# Altium PCB FPGA_board.PcbDoc (part 7 of 7)
Units mm, origin at the board's own origin, x right, y up, seen from the top; angles counter-clockwise.
Board outline 120 x 95 mm, 2 copper layers (Top Layer, Bottom Layer); 242 components, 219 nets, 1224 pads, 430 vias.
Unrouted connection lines stored in the file: 9.
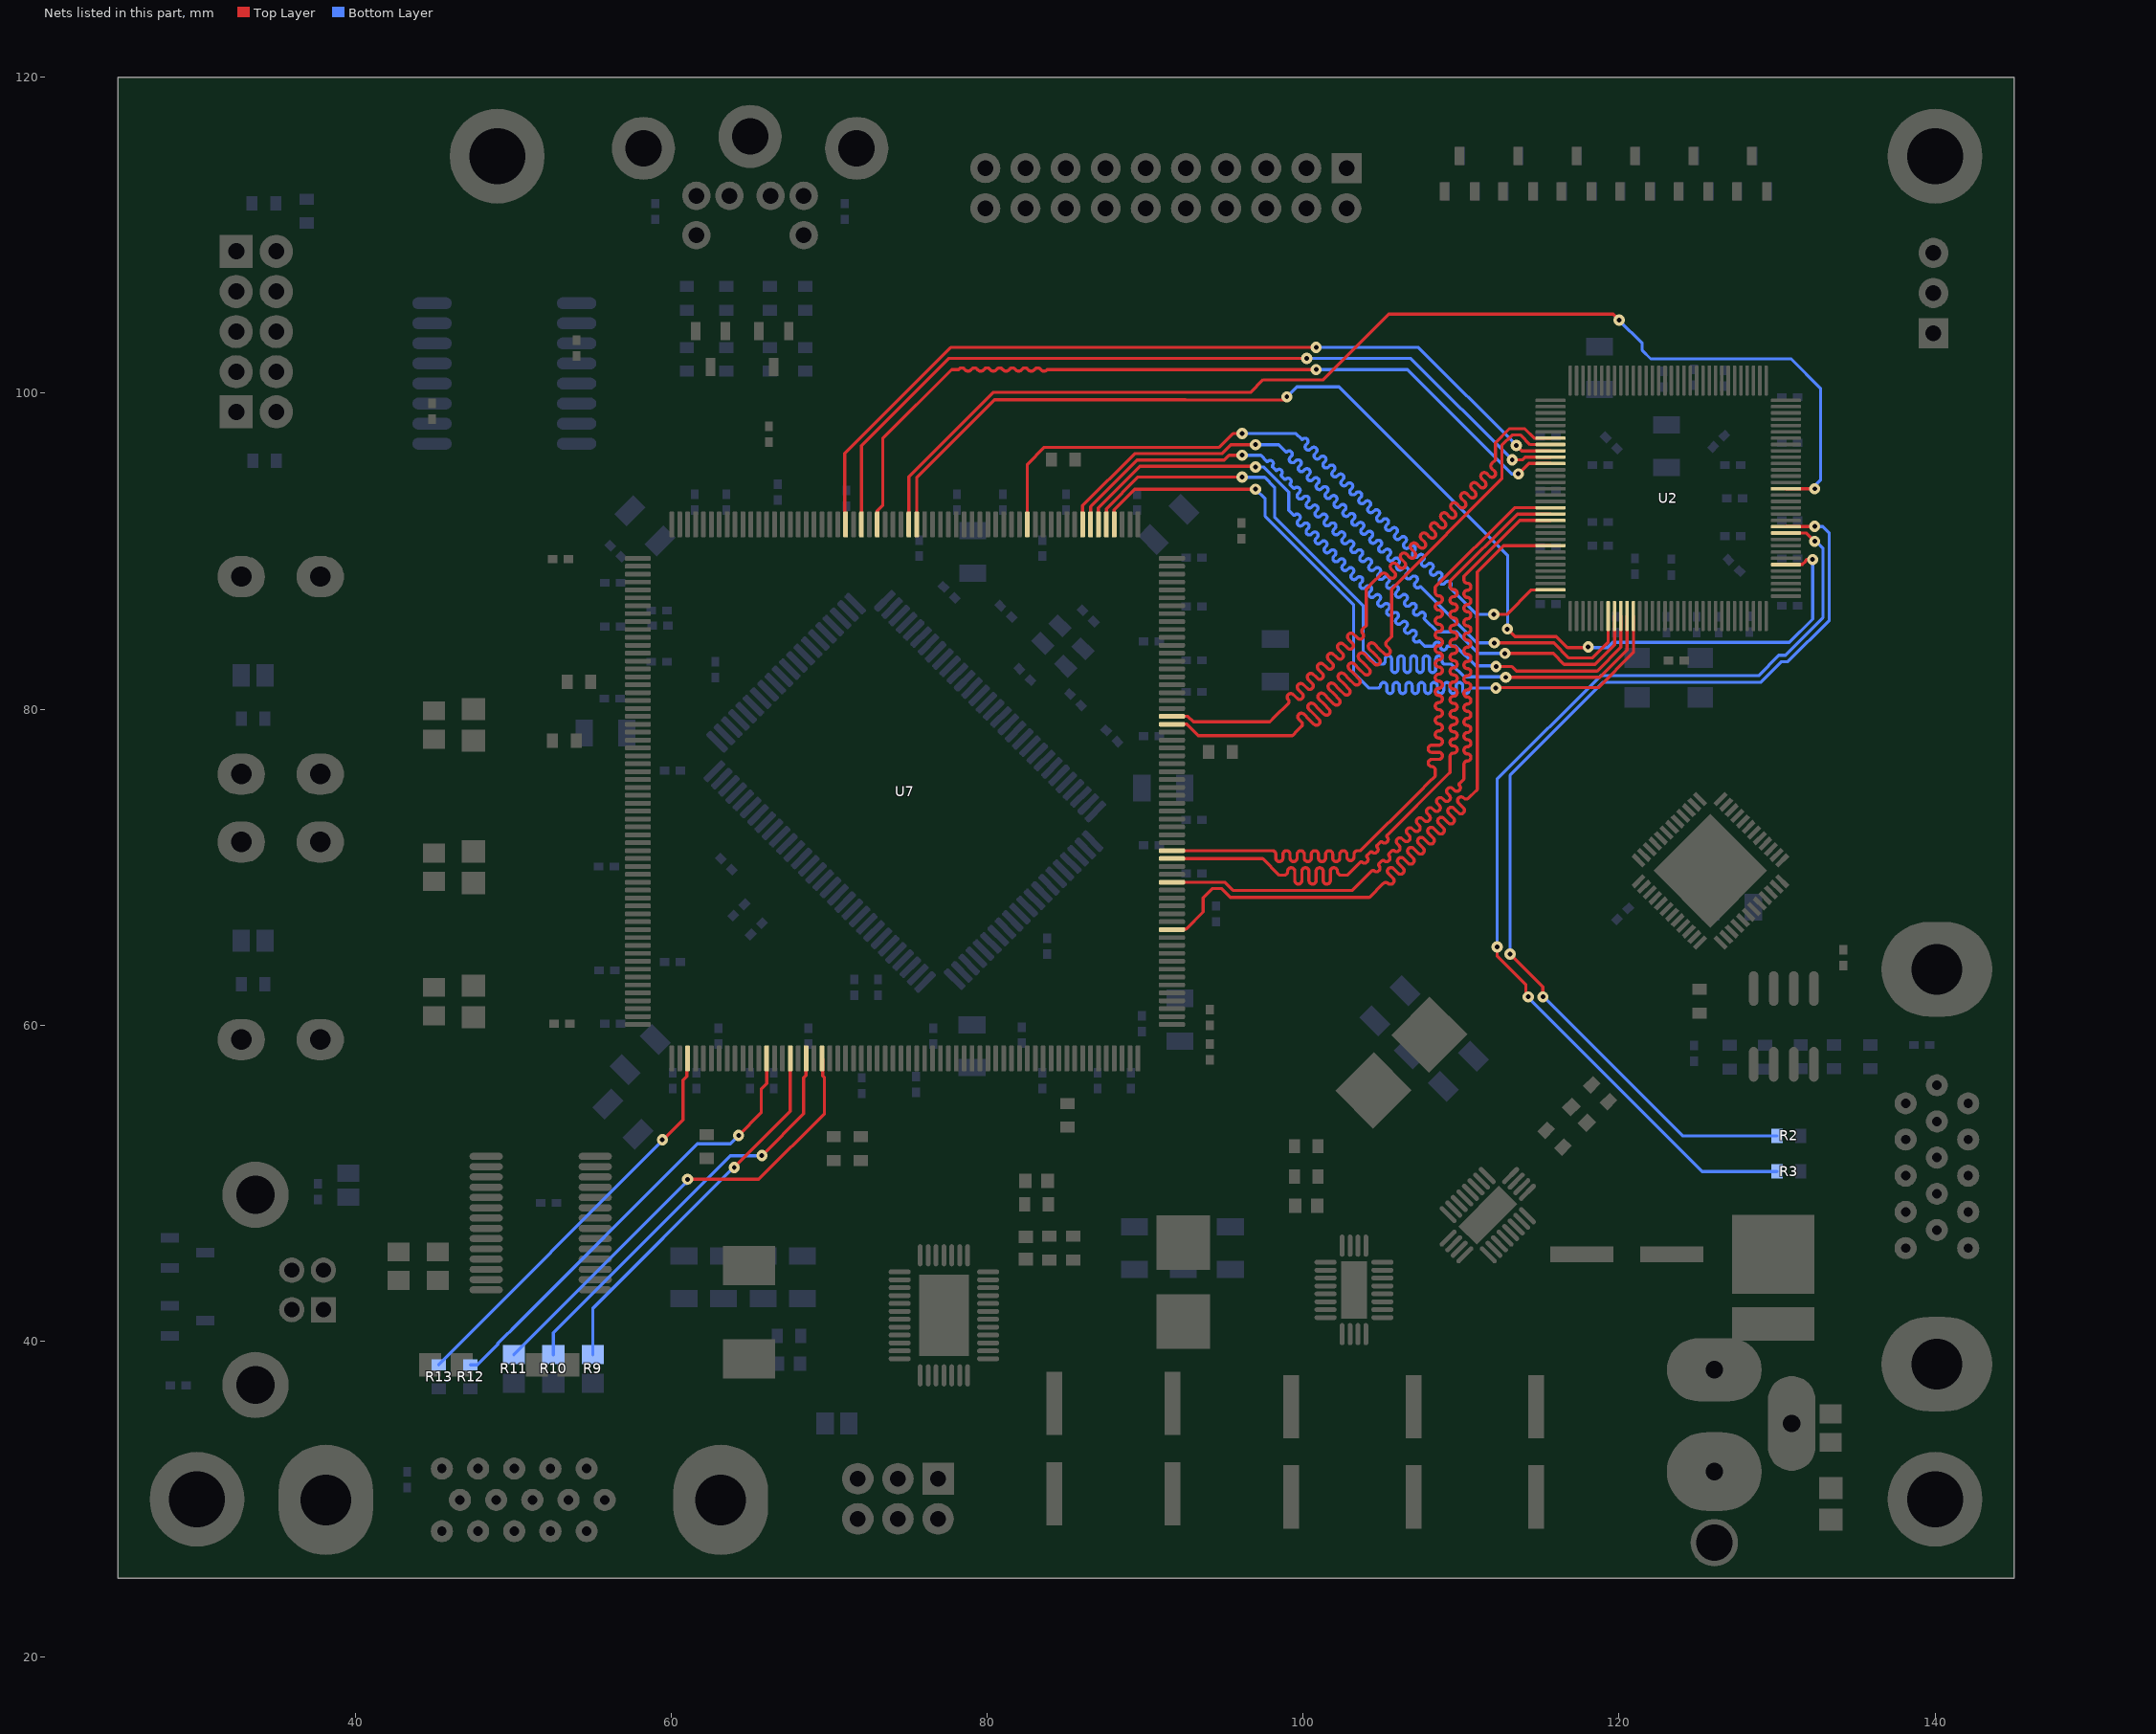
[diagram p7: the nets of this part, all layers, seen from the top]

## Via types
v1: diameter 0.71, hole 0.3, Top Layer to Bottom Layer, 393 vias
v2: diameter 1.4, hole 0.6, Top Layer to Bottom Layer, 32 vias
v3: diameter 2, hole 0.9, Top Layer to Bottom Layer, 4 vias
v4: diameter 1.2, hole 0.5, Top Layer to Bottom Layer, 1 vias

## Nets (pads, with @x,y where several pads share a name; then routed paths per layer and width w, separated by ;. In a path a pad name is that pad's centre, name@x,y a point inside that pad or via, vN(x,y) a via of type N, cw(c..) or ccw(c..) an arc to the next point about the centre after c; other vN are vias at no path point) (continued)
VGA1_G3: U2.107 U7.214 | length 62.5
  Top Layer w0.2: U7.214@73.05,91.7 73.05,92.555 73.397,92.902 73.397,97.135 77.762,101.5 78.2,101.5 cw(c78.4,101.35) 78.6,101.5 ccw(c78.8,101.65) 79,101.5 cw(c79.2,101.35) 79.4,101.5 ccw(c79.6,101.65) 79.8,101.5 cw(c80,101.35) 80.2,101.5 ccw(c80.4,101.65) 80.6,101.5 cw(c80.8,101.35) 81,101.5 ccw(c81.2,101.65) 81.4,101.5 cw(c81.6,101.35) 81.8,101.5 ccw(c82,101.65) 82.2,101.5 cw(c82.4,101.35) 82.6,101.5 ccw(c82.8,101.65) 83,101.5 cw(c83.2,101.35) 83.4,101.5 ccw(c83.6,101.65) 83.8,101.5 84.2,101.5 84.6,101.5 85.8,101.5 ; 85,101.5 85.8,101.5 ; 85.4,101.5 85.8,101.5 ; 88.6,101.5 89.4,101.5 ; 89,101.5 89.4,101.5 ; 91.8,101.5 91.4,101.5 ; 94.2,101.5 95,101.5 ; 94.6,101.5 95,101.5 ; v1(100.825,101.5) 98.6,101.5 98.2,101.5 97.8,101.5 97.4,101.5 97,101.5 96.6,101.5 96.2,101.5 95.8,101.5 95.4,101.5 91.4,101.5 ; v1(113.63,94.895) 114.289,95.553 U2.107@115.66,95.553 ; 85.8,101.5 86.2,101.5 86.6,101.5 87,101.5 87.4,101.5 87.8,101.5 88.2,101.5 89.4,101.5 ; 89.4,101.5 89.8,101.5 90.2,101.5 90.6,101.5 91,101.5 91.4,101.5 ; 91.4,101.5 92.2,101.5 92.6,101.5 93,101.5 93.4,101.5 93.8,101.5 95,101.5
  Bottom Layer w0.2: v1@100.7,101.5 101.1,101.5 101.5,101.5 101.9,101.5 102.3,101.5 102.7,101.5 103.1,101.5 103.5,101.5 103.9,101.5 104.3,101.5 105.5,101.5 ; 104.7,101.5 105.5,101.5 ; 105.1,101.5 105.5,101.5 ; v1(113.63,94.895) 113.205,94.895 106.7,101.4 106.6,101.5 106.3,101.5 105.9,101.5 105.5,101.5
VGA1_G4: U2.106 U7.216 | length 53.6
  Top Layer w0.2: U7.216@72.05,91.7 72.05,96.684 77.566,102.2 100.225,102.2 v1(100.23,102.205) ; v1(113.238,95.79) 113.9,95.79 114.064,95.953 U2.106@115.66,95.953
  Bottom Layer w0.2: v1@100.23,102.2 106.827,102.2 v1(113.238,95.79)
VGA1_G5: U2.105 U7.218 | length 54.3
  Top Layer w0.2: U7.218@71,92 71,96.2 77.7,102.9 v1(100.825,102.9) ; v1(113.5,96.7) 113.846,96.353 U2.105@115.66,96.353
  Bottom Layer w0.2: v1(100.825,102.9) 107.3,102.9 v1(113.5,96.7)
VGA1_G6: U2.104 U7.159 | length 53.6
  Top Layer w0.2: U7.159@91.7,79.05 92.653,79.05 93.376,78.326 99.326,78.326 99.65,78.65 99.891,78.891 ccw(c99.732,79.05) 99.891,79.209 99.734,79.366 cw(c99.893,79.525) 99.734,79.684 cw(c99.893,79.525) 100.052,79.684 100.368,79.368 100.684,79.052 ccw(c100.843,79.211) 101.002,79.052 ccw(c100.843,79.211) 101.002,79.37 100.686,79.686 100.37,80.002 cw(c100.529,80.161) 100.37,80.32 cw(c100.529,80.161) 100.689,80.32 101.004,80.004 101.32,79.689 ccw(c101.479,79.848) 101.638,79.689 ccw(c101.479,79.848) 101.638,80.007 101.323,80.323 101.007,80.638 cw(c101.166,80.797) 101.007,80.957 cw(c101.166,80.797) 101.325,80.957 101.641,80.641 101.957,80.325 ccw(c102.116,80.484) 102.275,80.325 ccw(c102.116,80.484) 102.275,80.643 101.959,80.959 101.643,81.275 cw(c101.802,81.434) 101.643,81.593 cw(c101.802,81.434) 101.961,81.593 102.277,81.277 102.593,80.961 ccw(c102.752,81.12) 102.911,80.961 ccw(c102.752,81.12) 102.911,81.279 102.595,81.595 102.28,81.911 cw(c102.439,82.07) 102.279,82.229 cw(c102.439,82.07) 102.598,82.229 102.914,81.914 103.229,81.598 ccw(c103.388,81.757) 103.548,81.598 ccw(c103.388,81.757) 103.548,81.916 103.232,82.232 102.916,82.548 cw(c103.075,82.707) 102.916,82.866 cw(c103.075,82.707) 103.234,82.866 103.55,82.55 103.866,82.234 ccw(c104.025,82.393) 104.184,82.234 ccw(c104.025,82.393) 104.184,82.552 103.868,82.868 103.552,83.184 cw(c103.711,83.343) 103.552,83.502 cw(c103.711,83.343) 103.87,83.502 104.186,83.186 104.502,82.87 ccw(c104.661,83.03) 104.82,82.87 ccw(c104.661,83.03) 104.82,83.189 104.504,83.505 104.189,83.82 cw(c104.348,83.979) 104.189,84.139 cw(c104.348,83.979) 104.507,84.139 104.823,83.823 105.139,83.507 ccw(c105.298,83.666) 105.457,83.507 ccw(c105.298,83.666) 105.457,83.825 105.3,83.982 cw(c105.459,84.141) 105.3,84.3 105.6,84.6 105.6,87.6 112.583,94.583 112.583,96.709 113.229,97.355 113.771,97.355 114.372,96.753 U2.104@115.66,96.753
VGA1_G7: U2.103 U7.160 | length 54.1
  Top Layer w0.2: U7.160@91.7,79.55 92.719,79.55 93.069,79.2 97.9,79.2 98.2,79.5 99.062,80.362 ccw(c98.939,80.486) 99.062,80.61 cw(c99.221,80.769) 99.062,80.928 cw(c99.221,80.769) 99.381,80.928 99.504,80.804 99.628,80.681 ccw(c99.787,80.84) 99.946,80.681 ccw(c99.787,80.84) 99.946,80.999 99.823,81.123 99.699,81.246 cw(c99.858,81.405) 99.699,81.564 cw(c99.858,81.405) 100.017,81.564 100.141,81.441 100.264,81.317 ccw(c100.424,81.476) 100.583,81.317 ccw(c100.424,81.476) 100.583,81.635 100.459,81.759 100.335,81.883 cw(c100.494,82.042) 100.335,82.201 cw(c100.494,82.042) 100.653,82.201 100.777,82.077 100.901,81.953 ccw(c101.06,82.112) 101.219,81.953 ccw(c101.06,82.112) 101.219,82.272 101.095,82.395 100.972,82.519 cw(c101.131,82.678) 100.972,82.837 cw(c101.131,82.678) 101.29,82.837 101.414,82.714 101.537,82.59 ccw(c101.696,82.749) 101.855,82.59 ccw(c101.696,82.749) 101.855,82.908 101.732,83.032 101.608,83.155 cw(c101.767,83.315) 101.608,83.474 cw(c101.767,83.315) 101.926,83.474 102.05,83.35 102.174,83.226 ccw(c102.333,83.385) 102.492,83.226 ccw(c102.333,83.385) 102.492,83.544 102.368,83.668 102.244,83.792 cw(c102.403,83.951) 102.244,84.11 cw(c102.403,83.951) 102.563,84.11 102.686,83.986 102.81,83.863 ccw(c102.969,84.022) 103.128,83.863 ccw(c102.969,84.022) 103.128,84.181 103.005,84.304 102.881,84.428 cw(c103.04,84.587) 102.881,84.746 cw(c103.04,84.587) 103.199,84.746 103.323,84.623 103.446,84.499 ccw(c103.606,84.658) 103.765,84.499 ccw(c103.606,84.658) 103.765,84.817 cw(c103.888,84.941) 103.765,85.065 103.8,85.1 104,85.3 104,87.6 104.5,88.1 104.791,88.391 104.95,88.55 cw(c105.109,88.391) 105.268,88.55 105.467,88.351 ccw(c105.626,88.51) 105.785,88.351 ccw(c105.626,88.51) 105.785,88.669 105.586,88.868 cw(c105.745,89.027) 105.586,89.186 cw(c105.745,89.027) 105.904,89.186 106.103,88.987 ccw(c106.262,89.146) 106.421,88.987 ccw(c106.262,89.146) 106.421,89.305 106.222,89.504 cw(c106.382,89.663) 106.222,89.822 cw(c106.382,89.663) 106.541,89.822 106.74,89.623 ccw(c106.899,89.783) 107.058,89.623 ccw(c106.899,89.783) 107.058,89.942 106.859,90.141 cw(c107.018,90.3) 106.859,90.459 cw(c107.018,90.3) 107.177,90.459 107.376,90.26 ccw(c107.535,90.419) 107.694,90.26 ccw(c107.535,90.419) 107.694,90.578 107.495,90.777 cw(c107.654,90.936) 107.495,91.095 cw(c107.654,90.936) 107.813,91.095 108.012,90.896 ccw(c108.172,91.055) 108.331,90.896 ccw(c108.172,91.055) 108.331,91.214 108.132,91.413 cw(c108.291,91.573) 108.132,91.732 cw(c108.291,91.573) 108.45,91.732 108.649,91.533 ccw(c108.808,91.692) 108.967,91.533 ccw(c108.808,91.692) 108.967,91.851 108.768,92.05 cw(c108.927,92.209) 108.768,92.368 cw(c108.927,92.209) 109.086,92.368 109.285,92.169 ccw(c109.444,92.328) 109.603,92.169 ccw(c109.444,92.328) 109.603,92.487 109.404,92.686 cw(c109.564,92.845) 109.404,93.004 cw(c109.564,92.845) 109.723,93.004 109.922,92.805 ccw(c110.081,92.965) 110.24,92.805 ccw(c110.081,92.965) 110.24,93.124 110.041,93.323 cw(c110.2,93.482) 110.041,93.641 cw(c110.2,93.482) 110.359,93.641 110.558,93.442 ccw(c110.717,93.601) 110.876,93.442 ccw(c110.717,93.601) 110.876,93.76 110.677,93.959 cw(c110.836,94.118) 110.677,94.277 cw(c110.836,94.118) 110.995,94.277 111.194,94.078 ccw(c111.353,94.237) 111.513,94.078 ccw(c111.354,94.237) 111.513,94.396 111.314,94.595 cw(c111.473,94.755) 111.314,94.914 cw(c111.473,94.755) 111.632,94.914 111.799,94.747 ccw(c111.958,94.906) 112.117,94.747 ccw(c111.958,94.906) 112.117,95.065 111.95,95.232 cw(c112.109,95.391) 111.95,95.55 112.183,95.783 112.183,96.874 113.063,97.755 114.035,97.755 114.636,97.153 115.436,97.153 U2.103@115.66,97.153
VGA1_HSYNC: R2.2 U2.44 | length 66
  Top Layer w0.2: v1(113.106,64.503) 115.182,62.426 v1(115.182,61.8) ; U2.44@130.56,91.553 132.455,91.553 v1@132.456,91.554
  Bottom Layer w0.2: v1(113.106,64.503) 113.106,75.836 118.97,81.7 128.966,81.7 130.276,83.01 130.69,83.01 133.305,85.626 133.305,91.145 132.896,91.554 v1@132.456,91.554 ; v1@115.204,61.822 124.025,53 R2.2@130,53
  other v1: 132.381,91.579
VGA1_PIXEL_CLK: U2.38 U7.209 | length 79
  Top Layer w0.2: U7.209@75.55,91.7 75.55,94.65 80.48,99.58 92.546,99.58 92.551,99.575 98.775,99.575 v1(98.975,99.775) ; v1(112.931,85.079) 113.415,84.595 116.036,84.595 116.732,83.9 v1@118,83.9 ; v1(132.25,89.475) 131.875,89.475 131.79,89.39 131.79,89.36 131.594,89.163 ; 131.594,89.163 131.584,89.153 U2.38@130.56,89.153 130.57,89.163 131.594,89.163
  Bottom Layer w0.2: v1(98.975,99.775) 99.6,100.4 99.675,100.4 99.68,100.405 102.27,100.405 112.955,89.72 112.955,85.104 v1(112.931,85.079) ; v1@118,83.9 119.275,83.9 119.6,84.225 130.773,84.225 132.25,85.702 v1(132.25,89.475)
  other v1: 118.05,83.95
VGA1_R0: U2.7 U7.188 | length 53.7
  Top Layer w0.2: U7.188@86.05,91.7 86.05,92.888 89.337,96.175 94.856,96.175 95.423,96.742 v1(96.988,96.742) ; v1(112.1,84.2) 112.105,84.195 115.871,84.195 116.821,83.245 118.305,83.245 119.31,84.249 U2.7@119.31,85.903
  Bottom Layer w0.2: v1@96.803,96.71 v1@96.988,96.71 ; v1(96.988,96.742) 98.458,96.742 98.906,96.294 ccw(c98.941,96.329) 98.977,96.294 cw(c99.118,96.153) 99.26,96.294 cw(c99.118,96.153) 99.26,96.011 99.224,95.976 99.189,95.94 ccw(c99.33,95.799) 99.189,95.658 ccw(c99.33,95.799) 99.472,95.658 99.542,95.728 cw(c99.684,95.587) 99.825,95.728 cw(c99.684,95.587) 99.825,95.445 99.79,95.41 99.755,95.375 ccw(c99.896,95.233) 99.755,95.092 ccw(c99.896,95.233) 100.037,95.092 100.073,95.127 100.108,95.163 cw(c100.25,95.021) 100.391,95.163 cw(c100.25,95.021) 100.391,94.88 100.356,94.844 100.32,94.809 ccw(c100.462,94.668) 100.32,94.526 ccw(c100.462,94.668) 100.603,94.526 100.638,94.562 100.674,94.597 cw(c100.815,94.455) 100.957,94.597 cw(c100.815,94.455) 100.957,94.314 100.921,94.279 100.886,94.243 ccw(c101.027,94.102) 100.886,93.96 ccw(c101.027,94.102) 101.169,93.96 101.24,94.031 cw(c101.381,93.89) 101.522,94.031 cw(c101.381,93.89) 101.522,93.748 101.487,93.713 101.452,93.678 ccw(c101.593,93.536) 101.452,93.395 ccw(c101.593,93.536) 101.734,93.395 101.77,93.43 101.805,93.465 cw(c101.947,93.324) 102.088,93.466 cw(c101.947,93.324) 102.088,93.183 102.053,93.147 102.017,93.112 ccw(c102.159,92.971) 102.017,92.829 ccw(c102.159,92.971) 102.3,92.829 102.336,92.864 102.371,92.9 cw(c102.512,92.758) 102.654,92.9 cw(c102.512,92.758) 102.654,92.617 102.618,92.582 102.583,92.546 ccw(c102.724,92.405) 102.583,92.263 ccw(c102.724,92.405) 102.866,92.263 102.937,92.334 cw(c103.078,92.193) 103.219,92.334 cw(c103.078,92.193) 103.219,92.051 103.184,92.016 103.149,91.981 ccw(c103.29,91.839) 103.149,91.698 ccw(c103.29,91.839) 103.432,91.698 103.467,91.733 103.502,91.768 cw(c103.644,91.627) 103.785,91.768 cw(c103.644,91.627) 103.785,91.486 103.75,91.45 103.714,91.415 ccw(c103.856,91.273) 103.714,91.132 ccw(c103.856,91.273) 103.997,91.132 104.033,91.167 104.068,91.203 cw(c104.209,91.061) 104.351,91.203 cw(c104.209,91.061) 104.351,90.92 104.28,90.849 ccw(c104.421,90.708) 104.28,90.566 ccw(c104.421,90.708) 104.563,90.566 104.598,90.602 104.634,90.637 cw(c104.775,90.496) 104.916,90.637 cw(c104.775,90.496) 104.916,90.354 104.881,90.319 104.846,90.284 ccw(c104.987,90.142) 104.846,90.001 ccw(c104.987,90.142) 105.129,90.001 105.164,90.036 105.199,90.071 cw(c105.341,89.93) 105.482,90.071 cw(c105.341,89.93) 105.482,89.789 105.447,89.753 105.411,89.718 ccw(c105.553,89.576) 105.411,89.435 ccw(c105.553,89.576) 105.694,89.435 105.73,89.47 105.765,89.506 cw(c105.906,89.364) 106.048,89.506 cw(c105.906,89.364) 106.048,89.223 105.977,89.152 ccw(c106.119,89.011) 105.977,88.869 ccw(c106.119,89.011) 106.26,88.869 106.295,88.905 106.331,88.94 cw(c106.472,88.799) 106.614,88.94 cw(c106.472,88.799) 106.614,88.657 106.578,88.622 106.543,88.586 ccw(c106.684,88.445) 106.543,88.304 ccw(c106.684,88.445) 106.826,88.304 106.861,88.339 106.896,88.374 cw(c107.038,88.233) 107.179,88.374 cw(c107.038,88.233) 107.179,88.092 107.144,88.056 107.108,88.021 ccw(c107.25,87.879) 107.108,87.738 ccw(c107.25,87.879) 107.391,87.738 cw(c107.427,87.703) 107.462,87.738 111,84.2 v1(112.1,84.2)
VGA1_R1: U2.8 U7.187 | length 53.8
  Top Layer w0.2: U7.187@86.55,91.7 86.55,92.822 89.503,95.775 95.022,95.775 95.322,96.075 v1(96.15,96.075) ; v1(112.778,83.529) 115.837,83.529 116.521,82.845 118.471,82.845 119.71,84.084 U2.8@119.71,85.903
  Bottom Layer w0.2: v1@96.15,96.025 v1@96.175,96.05 ; v1(96.15,96.075) 97.325,96.075 97.706,95.694 ccw(c97.741,95.729) 97.777,95.694 cw(c97.918,95.553) 98.06,95.694 cw(c97.918,95.553) 98.06,95.411 ccw(c98.095,95.376) 98.06,95.34 98.272,95.128 ccw(c98.307,95.164) 98.342,95.128 cw(c98.484,94.987) 98.625,95.128 cw(c98.484,94.987) 98.625,94.845 ccw(c98.661,94.81) 98.625,94.775 98.837,94.563 ccw(c98.873,94.598) 98.908,94.563 cw(c99.05,94.421) 99.191,94.563 cw(c99.05,94.421) 99.191,94.28 ccw(c99.226,94.244) 99.191,94.209 99.403,93.997 ccw(c99.438,94.032) 99.474,93.997 cw(c99.615,93.855) 99.757,93.997 cw(c99.615,93.855) 99.757,93.714 99.721,93.679 99.686,93.643 ccw(c99.827,93.502) 99.686,93.36 ccw(c99.827,93.502) 99.969,93.36 100.04,93.431 cw(c100.181,93.29) 100.322,93.431 cw(c100.181,93.29) 100.322,93.148 100.287,93.113 100.252,93.078 ccw(c100.393,92.936) 100.252,92.795 ccw(c100.393,92.936) 100.534,92.795 100.57,92.83 100.605,92.865 cw(c100.747,92.724) 100.888,92.866 cw(c100.747,92.724) 100.888,92.583 100.853,92.547 100.817,92.512 ccw(c100.959,92.371) 100.817,92.229 ccw(c100.959,92.371) 101.1,92.229 101.136,92.264 101.171,92.3 cw(c101.312,92.158) 101.454,92.3 cw(c101.312,92.158) 101.454,92.017 101.418,91.982 101.383,91.946 ccw(c101.524,91.805) 101.383,91.663 ccw(c101.524,91.805) 101.666,91.663 101.737,91.734 cw(c101.878,91.593) 102.019,91.734 cw(c101.878,91.593) 102.019,91.451 101.984,91.416 101.949,91.381 ccw(c102.09,91.239) 101.949,91.098 ccw(c102.09,91.239) 102.232,91.098 102.267,91.133 102.302,91.168 cw(c102.444,91.027) 102.585,91.168 cw(c102.444,91.027) 102.585,90.886 102.55,90.85 102.514,90.815 ccw(c102.656,90.673) 102.514,90.532 ccw(c102.656,90.673) 102.797,90.532 102.833,90.567 102.868,90.603 cw(c103.009,90.461) 103.151,90.603 cw(c103.009,90.461) 103.151,90.32 103.08,90.249 ccw(c103.221,90.108) 103.08,89.966 ccw(c103.221,90.108) 103.363,89.966 103.398,90.002 103.434,90.037 cw(c103.575,89.896) 103.716,90.037 cw(c103.575,89.896) 103.716,89.754 103.681,89.719 103.646,89.684 ccw(c103.787,89.542) 103.646,89.401 ccw(c103.787,89.542) 103.929,89.401 103.964,89.436 103.999,89.471 cw(c104.141,89.33) 104.282,89.471 cw(c104.141,89.33) 104.282,89.189 104.247,89.153 104.211,89.118 ccw(c104.353,88.976) 104.211,88.835 ccw(c104.353,88.976) 104.494,88.835 104.53,88.87 104.565,88.906 cw(c104.706,88.764) 104.848,88.906 cw(c104.706,88.764) 104.848,88.623 104.777,88.552 ccw(c104.919,88.411) 104.777,88.269 ccw(c104.919,88.411) 105.06,88.269 105.095,88.305 105.131,88.34 cw(c105.272,88.199) 105.414,88.34 cw(c105.272,88.199) 105.414,88.057 105.378,88.022 105.343,87.986 ccw(c105.484,87.845) 105.343,87.704 ccw(c105.484,87.845) 105.626,87.704 105.661,87.739 105.696,87.774 cw(c105.838,87.633) 105.979,87.774 cw(c105.838,87.633) 105.979,87.492 105.944,87.456 105.909,87.421 ccw(c106.05,87.279) 105.908,87.138 ccw(c106.05,87.279) 106.191,87.138 106.227,87.173 106.262,87.209 cw(c106.403,87.067) 106.545,87.209 cw(c106.403,87.067) 106.545,86.926 106.474,86.855 ccw(c106.616,86.714) 106.474,86.572 ccw(c106.616,86.714) 106.757,86.572 106.792,86.608 106.828,86.643 cw(c106.969,86.502) 107.111,86.643 cw(c106.969,86.502) 107.111,86.36 107.075,86.325 107.04,86.289 ccw(c107.181,86.148) 107.04,86.007 ccw(c107.181,86.148) 107.323,86.007 107.358,86.042 107.393,86.077 cw(c107.535,85.936) 107.676,86.077 cw(c107.535,85.936) 107.676,85.794 ccw(c107.712,85.759) 107.676,85.724 108.5,84.9 109.734,84.9 111.089,83.545 112.762,83.545 v1(112.778,83.529)
VGA1_R2: U2.9 U7.186 | length 53.5
  Top Layer w0.2: U7.186@87.05,91.7 87.05,92.756 89.669,95.375 94.623,95.375 94.628,95.37 v1@96.92,95.37 ; v1(112.213,82.7) 113.224,82.7 113.501,82.422 118.614,82.422 120.11,83.918 U2.9@120.11,85.903
  Bottom Layer w0.2: v1(96.988,95.334) 97.5,95.334 99.1,93.734 99.1,92.6 99.406,92.294 ccw(c99.441,92.329) 99.477,92.294 cw(c99.618,92.153) 99.76,92.294 cw(c99.618,92.153) 99.76,92.011 99.724,91.976 99.689,91.94 ccw(c99.83,91.799) 99.689,91.658 ccw(c99.83,91.799) 99.972,91.658 100.042,91.728 cw(c100.184,91.587) 100.325,91.728 cw(c100.184,91.587) 100.325,91.445 100.29,91.41 100.255,91.375 ccw(c100.396,91.233) 100.255,91.092 ccw(c100.396,91.233) 100.537,91.092 100.573,91.127 100.608,91.163 cw(c100.75,91.021) 100.891,91.163 cw(c100.75,91.021) 100.891,90.88 100.856,90.844 100.82,90.809 ccw(c100.962,90.668) 100.82,90.526 ccw(c100.962,90.668) 101.103,90.526 101.138,90.562 101.174,90.597 cw(c101.315,90.455) 101.457,90.597 cw(c101.315,90.455) 101.457,90.314 101.421,90.279 101.386,90.243 ccw(c101.527,90.102) 101.386,89.96 ccw(c101.527,90.102) 101.669,89.96 101.739,90.031 cw(c101.881,89.89) 102.022,90.031 cw(c101.881,89.89) 102.022,89.748 101.987,89.713 101.952,89.678 ccw(c102.093,89.536) 101.952,89.395 ccw(c102.093,89.536) 102.234,89.395 102.27,89.43 102.305,89.466 cw(c102.447,89.324) 102.588,89.466 cw(c102.447,89.324) 102.588,89.183 102.553,89.147 102.517,89.112 ccw(c102.659,88.971) 102.517,88.829 ccw(c102.659,88.971) 102.8,88.829 102.836,88.864 102.871,88.9 cw(c103.012,88.758) 103.154,88.9 cw(c103.012,88.758) 103.154,88.617 103.118,88.582 103.083,88.546 ccw(c103.224,88.405) 103.083,88.263 ccw(c103.224,88.405) 103.366,88.263 103.437,88.334 cw(c103.578,88.193) 103.719,88.334 cw(c103.578,88.193) 103.719,88.051 103.684,88.016 103.649,87.981 ccw(c103.79,87.839) 103.649,87.698 ccw(c103.79,87.839) 103.932,87.698 103.967,87.733 104.002,87.768 cw(c104.144,87.627) 104.285,87.768 cw(c104.144,87.627) 104.285,87.486 104.25,87.45 104.214,87.415 ccw(c104.356,87.273) 104.214,87.132 ccw(c104.356,87.273) 104.497,87.132 104.533,87.167 104.568,87.203 cw(c104.709,87.061) 104.851,87.203 cw(c104.709,87.061) 104.851,86.92 104.78,86.849 ccw(c104.921,86.708) 104.78,86.566 ccw(c104.921,86.708) 105.063,86.566 105.098,86.602 105.134,86.637 cw(c105.275,86.496) 105.416,86.637 cw(c105.275,86.496) 105.416,86.354 105.381,86.319 105.346,86.284 ccw(c105.487,86.142) 105.346,86.001 ccw(c105.487,86.142) 105.629,86.001 105.664,86.036 105.699,86.071 cw(c105.841,85.93) 105.982,86.071 cw(c105.841,85.93) 105.982,85.789 105.947,85.753 105.911,85.718 ccw(c106.053,85.576) 105.911,85.435 ccw(c106.053,85.576) 106.194,85.435 106.23,85.47 106.265,85.506 cw(c106.406,85.364) 106.548,85.506 cw(c106.406,85.364) 106.548,85.223 106.477,85.152 ccw(c106.619,85.011) 106.477,84.869 ccw(c106.619,85.011) 106.76,84.869 106.795,84.905 106.831,84.94 cw(c106.972,84.799) 107.114,84.94 cw(c106.972,84.799) 107.114,84.657 107.078,84.622 107.043,84.586 ccw(c107.184,84.445) 107.043,84.304 ccw(c107.184,84.445) 107.326,84.304 cw(c107.361,84.268) 107.396,84.304 107.7,84 108.25,84 ccw(c108.25,84.05) 108.3,84.05 cw(c108.5,84.05) 108.5,84.25 cw(c108.5,84.05) 108.7,84.05 108.7,83.95 ccw(c108.9,83.95) 108.9,83.75 ccw(c108.9,83.95) 109.1,83.95 cw(c109.15,83.95) 109.15,84 109.676,84 110.931,82.745 112.168,82.745 v1(112.213,82.7)
VGA1_R3: U2.10 U7.185 | length 53.6
  Top Layer w0.2: U7.185@87.55,91.7 87.55,92.691 89.559,94.7 v1(96.15,94.7) ; v1@96.15,94.6 v1@96.25,94.7 ; v1(112.822,82.022) 118.78,82.022 120.51,83.752 U2.10@120.51,85.903
  Bottom Layer w0.2: v1(96.15,94.7) 96.171,94.679 97.571,94.679 98.2,94.05 98.2,92.173 103.8,86.573 103.8,83.7 104.65,82.85 105,82.85 ccw(c105,83.05) 105.2,83.05 105.2,83.177 cw(c105.4,83.177) 105.4,83.377 cw(c105.4,83.177) 105.6,83.177 105.6,82.85 105.6,82.522 ccw(c105.8,82.522) 105.8,82.322 ccw(c105.8,82.522) 106,82.522 106,82.85 106,83.177 cw(c106.2,83.177) 106.2,83.377 cw(c106.2,83.177) 106.4,83.177 106.4,82.85 106.4,82.522 ccw(c106.6,82.522) 106.6,82.322 ccw(c106.6,82.522) 106.8,82.522 106.8,82.85 106.8,83.177 cw(c107,83.177) 107,83.377 cw(c107,83.177) 107.2,83.177 107.2,82.85 107.2,82.522 ccw(c107.4,82.522) 107.4,82.322 ccw(c107.4,82.522) 107.6,82.522 107.6,82.85 107.6,83.177 cw(c107.8,83.177) 107.8,83.377 cw(c107.8,83.177) 108,83.177 108,82.85 108,82.522 ccw(c108.2,82.522) 108.2,82.322 ccw(c108.2,82.522) 108.4,82.522 108.4,82.85 108.4,83.177 cw(c108.6,83.177) 108.6,83.377 cw(c108.6,83.177) 108.8,83.177 108.8,83.05 ccw(c109,83.05) 109,82.85 109.3,82.85 109.4,82.85 110.205,82.045 112.8,82.045 v1(112.822,82.022)
VGA1_R4: U2.11 U7.184 | length 53.2
  Top Layer w0.2: U7.184@88.05,91.7 88.05,92.625 89.351,93.926 v1(96.988,93.926) ; v1(112.2,81.345) 112.222,81.367 118.691,81.367 120.91,83.587 U2.11@120.91,85.903
  Bottom Layer w0.2: v1(96.988,93.926) 97.6,93.315 97.6,92.208 103.201,86.606 103.201,82.299 104.155,81.345 104.75,81.345 ccw(c104.75,81.495) 104.9,81.495 cw(c105.1,81.495) 105.1,81.695 cw(c105.1,81.495) 105.3,81.495 105.3,81.195 ccw(c105.5,81.195) 105.5,80.995 ccw(c105.5,81.195) 105.7,81.195 105.7,81.495 cw(c105.9,81.495) 105.9,81.695 cw(c105.9,81.495) 106.1,81.495 106.1,81.195 ccw(c106.3,81.195) 106.3,80.995 ccw(c106.3,81.195) 106.5,81.195 106.5,81.495 cw(c106.7,81.495) 106.7,81.695 cw(c106.7,81.495) 106.9,81.495 106.9,81.195 ccw(c107.1,81.195) 107.1,80.995 ccw(c107.1,81.195) 107.3,81.195 107.3,81.495 cw(c107.5,81.495) 107.5,81.695 cw(c107.5,81.495) 107.7,81.495 107.7,81.195 ccw(c107.9,81.195) 107.9,80.995 ccw(c107.9,81.195) 108.1,81.195 108.1,81.495 cw(c108.3,81.495) 108.3,81.695 cw(c108.3,81.495) 108.5,81.495 108.5,81.195 ccw(c108.7,81.195) 108.7,80.995 ccw(c108.7,81.195) 108.9,81.195 108.9,81.495 cw(c109.1,81.495) 109.1,81.695 cw(c109.1,81.495) 109.3,81.495 109.3,81.195 ccw(c109.5,81.195) 109.5,80.995 ccw(c109.5,81.195) 109.7,81.195 109.7,81.495 cw(c109.9,81.495) 109.9,81.695 cw(c109.9,81.495) 110.1,81.495 110.1,81.195 ccw(c110.3,81.195) 110.3,80.995 ccw(c110.3,81.195) 110.5,81.195 cw(c110.65,81.195) 110.65,81.345 v1(112.2,81.345)
VGA1_R5: U2.116 U7.139 | length 53.8
  Top Layer w0.2: U7.139@91.7,69.05 95.05,69.05 95.566,68.534 103.134,68.534 103.5,68.9 104.379,69.779 cw(c104.432,69.725) 104.485,69.779 ccw(c104.644,69.938) 104.803,69.779 ccw(c104.644,69.938) 104.803,70.097 cw(c104.856,70.15) 104.803,70.203 105.015,70.415 cw(c105.068,70.362) 105.121,70.415 ccw(c105.28,70.574) 105.439,70.415 ccw(c105.28,70.574) 105.439,70.733 cw(c105.492,70.786) 105.439,70.839 105.651,71.051 cw(c105.704,70.998) 105.757,71.051 ccw(c105.916,71.21) 106.076,71.051 ccw(c105.916,71.21) 106.076,71.369 106.023,71.423 105.97,71.476 cw(c106.129,71.635) 105.969,71.794 cw(c106.129,71.635) 106.288,71.794 106.341,71.741 106.394,71.688 ccw(c106.553,71.847) 106.712,71.688 ccw(c106.553,71.847) 106.712,72.006 106.659,72.059 106.606,72.112 cw(c106.765,72.271) 106.606,72.43 cw(c106.765,72.271) 106.924,72.43 106.977,72.377 107.03,72.324 ccw(c107.189,72.483) 107.348,72.324 ccw(c107.189,72.483) 107.348,72.642 107.295,72.695 107.242,72.748 cw(c107.401,72.907) 107.242,73.067 cw(c107.401,72.907) 107.56,73.067 107.614,73.014 107.667,72.96 ccw(c107.826,73.12) 107.985,72.96 ccw(c107.826,73.12) 107.985,73.279 107.932,73.332 107.879,73.385 cw(c108.038,73.544) 107.879,73.703 cw(c108.038,73.544) 108.197,73.703 108.25,73.65 108.303,73.597 ccw(c108.462,73.756) 108.621,73.597 ccw(c108.462,73.756) 108.621,73.915 108.568,73.968 108.515,74.021 cw(c108.674,74.18) 108.515,74.339 cw(c108.674,74.18) 108.833,74.339 108.886,74.286 108.939,74.233 ccw(c109.098,74.392) 109.258,74.233 ccw(c109.098,74.392) 109.258,74.551 109.205,74.605 109.151,74.658 cw(c109.311,74.817) 109.151,74.976 cw(c109.311,74.817) 109.47,74.976 109.523,74.923 109.576,74.87 ccw(c109.735,75.029) 109.894,74.87 ccw(c109.735,75.029) 109.894,75.188 cw(c109.947,75.241) 109.894,75.294 110,75.4 110.184,75.584 110.184,76.514 cw(c110.395,76.514) 110.395,76.725 ccw(c110.395,76.95) 110.62,76.95 ccw(c110.395,76.95) 110.395,77.175 cw(c110.395,77.386) 110.184,77.386 110.184,77.414 cw(c110.395,77.414) 110.395,77.625 ccw(c110.395,77.85) 110.62,77.85 ccw(c110.395,77.85) 110.395,78.075 cw(c110.395,78.286) 110.184,78.286 110.184,78.314 cw(c110.395,78.314) 110.395,78.525 ccw(c110.395,78.75) 110.62,78.75 ccw(c110.395,78.75) 110.395,78.975 cw(c110.395,79.186) 110.184,79.186 110.184,79.214 cw(c110.395,79.214) 110.395,79.425 ccw(c110.395,79.65) 110.62,79.65 ccw(c110.395,79.65) 110.395,79.875 cw(c110.395,80.086) 110.184,80.086 110.184,80.114 cw(c110.395,80.114) 110.395,80.325 ccw(c110.395,80.55) 110.62,80.55 ccw(c110.395,80.55) 110.395,80.775 cw(c110.395,80.986) 110.184,80.986 110.184,81.014 cw(c110.395,81.014) 110.395,81.225 ccw(c110.395,81.45) 110.62,81.45 ccw(c110.395,81.45) 110.395,81.675 cw(c110.395,81.886) 110.184,81.886 110.184,81.914 cw(c110.395,81.914) 110.395,82.125 ccw(c110.395,82.35) 110.62,82.35 ccw(c110.395,82.35) 110.395,82.575 cw(c110.395,82.786) 110.184,82.786 110.184,82.814 cw(c110.395,82.814) 110.395,83.025 ccw(c110.395,83.25) 110.62,83.25 ccw(c110.395,83.25) 110.395,83.475 cw(c110.395,83.686) 110.184,83.686 110.184,83.714 cw(c110.395,83.714) 110.395,83.925 ccw(c110.395,84.15) 110.62,84.15 ccw(c110.395,84.15) 110.395,84.375 cw(c110.395,84.586) 110.184,84.586 110.184,84.614 cw(c110.395,84.614) 110.395,84.825 ccw(c110.395,85.05) 110.62,85.05 ccw(c110.395,85.05) 110.395,85.275 cw(c110.395,85.486) 110.184,85.486 110.184,85.514 cw(c110.395,85.514) 110.395,85.725 ccw(c110.395,85.95) 110.62,85.95 ccw(c110.395,85.95) 110.395,86.175 cw(c110.395,86.386) 110.184,86.386 110.184,86.414 cw(c110.395,86.414) 110.395,86.625 ccw(c110.395,86.85) 110.62,86.85 ccw(c110.395,86.85) 110.395,87.075 cw(c110.395,87.286) 110.184,87.286 110.184,87.314 cw(c110.395,87.314) 110.395,87.525 ccw(c110.395,87.75) 110.62,87.75 ccw(c110.395,87.75) 110.395,87.975 cw(c110.395,88.186) 110.184,88.186 110.184,88.416 113.722,91.953 U2.116@115.66,91.953
VGA1_R6: U2.115 U7.142 | length 54.3
  Top Layer w0.2: U7.142@91.7,70.55 97.45,70.55 98.5,69.5 98.8,69.5 ccw(c98.8,69.725) 99.025,69.725 99.025,69.746 cw(c99.25,69.746) 99.25,69.971 cw(c99.25,69.746) 99.475,69.746 99.475,69.5 99.475,69.159 ccw(c99.7,69.159) 99.7,68.934 ccw(c99.7,69.159) 99.925,69.159 99.925,69.5 99.925,69.746 cw(c100.15,69.746) 100.15,69.971 cw(c100.15,69.746) 100.375,69.746 100.375,69.5 100.375,69.159 ccw(c100.6,69.159) 100.6,68.934 ccw(c100.6,69.159) 100.825,69.159 100.825,69.5 100.825,69.746 cw(c101.05,69.746) 101.05,69.971 cw(c101.05,69.746) 101.275,69.746 101.275,69.5 101.275,69.159 ccw(c101.5,69.159) 101.5,68.934 ccw(c101.5,69.159) 101.725,69.159 101.725,69.5 101.725,69.746 cw(c101.95,69.746) 101.95,69.971 cw(c101.95,69.746) 102.175,69.746 102.175,69.725 ccw(c102.4,69.725) 102.4,69.5 102.6,69.5 102.8,69.5 ; 103.2,69.9 102.8,69.5 ; 104.049,70.749 ccw(c104.102,70.695) 104.049,70.642 cw(c103.889,70.483) 104.049,70.324 cw(c103.889,70.483) 103.73,70.324 ccw(c103.677,70.271) 103.624,70.324 103.359,70.059 102.8,69.5 ; 104.049,70.749 104.261,70.961 cw(c104.314,70.908) 104.367,70.961 ccw(c104.526,71.12) 104.685,70.961 ccw(c104.526,71.12) 104.685,71.279 cw(c104.738,71.332) 104.685,71.385 104.897,71.597 cw(c104.95,71.544) 105.003,71.597 ccw(c105.162,71.756) 105.321,71.597 ccw(c105.162,71.756) 105.321,71.915 cw(c105.374,71.968) 105.321,72.021 109.1,75.8 109.303,76.003 109.303,77 cw(c109.528,77) 109.528,77.225 ccw(c109.528,77.45) 109.753,77.45 ccw(c109.528,77.45) 109.528,77.675 cw(c109.528,77.9) 109.303,77.9 cw(c109.528,77.9) 109.528,78.125 ccw(c109.528,78.35) 109.753,78.35 ccw(c109.528,78.35) 109.528,78.575 cw(c109.528,78.8) 109.303,78.8 cw(c109.528,78.8) 109.528,79.025 ccw(c109.528,79.25) 109.753,79.25 ccw(c109.528,79.25) 109.528,79.475 cw(c109.528,79.7) 109.303,79.7 cw(c109.528,79.7) 109.528,79.925 ccw(c109.528,80.15) 109.753,80.15 ccw(c109.528,80.15) 109.528,80.375 cw(c109.528,80.6) 109.303,80.6 cw(c109.528,80.6) 109.528,80.825 ccw(c109.528,81.05) 109.753,81.05 ccw(c109.528,81.05) 109.528,81.275 cw(c109.528,81.5) 109.303,81.5 cw(c109.528,81.5) 109.528,81.725 ccw(c109.528,81.95) 109.753,81.95 ccw(c109.528,81.95) 109.528,82.175 cw(c109.528,82.4) 109.303,82.4 cw(c109.528,82.4) 109.528,82.625 ccw(c109.528,82.85) 109.753,82.85 ccw(c109.528,82.85) 109.528,83.075 cw(c109.528,83.3) 109.303,83.3 cw(c109.528,83.3) 109.528,83.525 ccw(c109.528,83.75) 109.753,83.75 ccw(c109.528,83.75) 109.528,83.975 cw(c109.528,84.2) 109.303,84.2 cw(c109.528,84.2) 109.528,84.425 ccw(c109.528,84.65) 109.753,84.65 ccw(c109.528,84.65) 109.528,84.875 cw(c109.528,85.1) 109.303,85.1 cw(c109.528,85.1) 109.528,85.325 ccw(c109.528,85.55) 109.753,85.55 ccw(c109.528,85.55) 109.528,85.775 cw(c109.528,86) 109.303,86 cw(c109.528,86) 109.528,86.225 ccw(c109.528,86.45) 109.753,86.45 ccw(c109.528,86.45) 109.528,86.675 cw(c109.528,86.9) 109.303,86.9 cw(c109.528,86.9) 109.528,87.125 ccw(c109.528,87.35) 109.753,87.35 ccw(c109.528,87.35) 109.528,87.575 cw(c109.528,87.8) 109.303,87.8 109.303,88.1 113.556,92.353 114.256,92.353 U2.115@115.66,92.353
VGA1_R7: U2.114 U7.143 | length 53.6
  Top Layer w0.2: U7.143@91.7,71.05 97.6,71.05 97.825,71.05 98.05,71.05 cw(c98.05,70.825) 98.275,70.825 98.275,70.583 ccw(c98.5,70.583) 98.5,70.358 ccw(c98.5,70.583) 98.725,70.583 98.725,70.825 cw(c98.95,70.825) 98.95,71.05 cw(c98.95,70.825) 99.175,70.825 99.175,70.583 ccw(c99.4,70.583) 99.4,70.358 ccw(c99.4,70.583) 99.625,70.583 99.625,70.825 cw(c99.85,70.825) 99.85,71.05 cw(c99.85,70.825) 100.075,70.825 100.075,70.583 ccw(c100.3,70.583) 100.3,70.358 ccw(c100.3,70.583) 100.525,70.583 100.525,70.825 cw(c100.75,70.825) 100.75,71.05 cw(c100.75,70.825) 100.975,70.825 100.975,70.583 ccw(c101.2,70.583) 101.2,70.358 ccw(c101.2,70.583) 101.425,70.583 101.425,70.825 cw(c101.65,70.825) 101.65,71.05 cw(c101.65,70.825) 101.875,70.825 101.875,70.583 ccw(c102.1,70.583) 102.1,70.358 ccw(c102.1,70.583) 102.325,70.583 102.325,70.825 cw(c102.55,70.825) 102.55,71.05 cw(c102.55,70.825) 102.775,70.825 102.775,70.641 ccw(c103,70.641) 103,70.416 ccw(c103,70.641) 103.225,70.641 103.225,70.825 cw(c103.45,70.825) 103.45,71.05 103.65,71.05 107.2,74.6 108.1,75.5 108.21,75.61 108.369,75.769 108.369,75.925 108.369,76.15 ccw(c108.144,76.15) 108.144,76.375 cw(c108.144,76.6) 107.919,76.6 cw(c108.144,76.6) 108.144,76.825 108.369,76.825 108.594,76.825 ccw(c108.594,77.05) 108.819,77.05 ccw(c108.594,77.05) 108.594,77.275 108.369,77.275 108.144,77.275 cw(c108.144,77.5) 107.919,77.5 cw(c108.144,77.5) 108.144,77.725 108.369,77.725 108.594,77.725 ccw(c108.594,77.95) 108.819,77.95 ccw(c108.594,77.95) 108.594,78.175 cw(c108.594,78.4) 108.369,78.4 cw(c108.594,78.4) 108.594,78.625 ccw(c108.594,78.85) 108.819,78.85 ccw(c108.594,78.85) 108.594,79.075 cw(c108.594,79.3) 108.369,79.3 cw(c108.594,79.3) 108.594,79.525 ccw(c108.594,79.75) 108.819,79.75 ccw(c108.594,79.75) 108.594,79.975 cw(c108.594,80.2) 108.369,80.2 cw(c108.594,80.2) 108.594,80.425 ccw(c108.594,80.65) 108.819,80.65 ccw(c108.594,80.65) 108.594,80.875 cw(c108.594,81.1) 108.369,81.1 cw(c108.594,81.1) 108.594,81.325 ccw(c108.594,81.55) 108.819,81.55 ccw(c108.594,81.55) 108.594,81.775 cw(c108.594,82) 108.369,82 cw(c108.594,82) 108.594,82.225 ccw(c108.594,82.45) 108.819,82.45 ccw(c108.594,82.45) 108.594,82.675 cw(c108.594,82.9) 108.369,82.9 cw(c108.594,82.9) 108.594,83.125 ccw(c108.594,83.35) 108.819,83.35 ccw(c108.594,83.35) 108.594,83.575 cw(c108.594,83.8) 108.369,83.8 cw(c108.594,83.8) 108.594,84.025 ccw(c108.594,84.25) 108.819,84.25 ccw(c108.594,84.25) 108.594,84.475 cw(c108.594,84.7) 108.369,84.7 cw(c108.594,84.7) 108.594,84.925 ccw(c108.594,85.15) 108.819,85.15 ccw(c108.594,85.15) 108.594,85.375 cw(c108.594,85.6) 108.369,85.6 cw(c108.594,85.6) 108.594,85.825 ccw(c108.594,86.05) 108.819,86.05 ccw(c108.594,86.05) 108.594,86.275 cw(c108.594,86.5) 108.369,86.5 cw(c108.594,86.5) 108.594,86.725 ccw(c108.594,86.95) 108.819,86.95 ccw(c108.594,86.95) 108.594,87.175 cw(c108.594,87.4) 108.369,87.4 108.369,87.731 113.391,92.753 113.961,92.753 U2.114@115.66,92.753
VGA1_RESET_N: U2.127 U7.195 | length 53.6
  Top Layer w0.2: U7.195@82.55,91.7 82.55,95.5 83.625,96.575 94.691,96.575 95.566,97.45 v1(96.15,97.45) ; v1(112.075,86) 112.9,86 114.453,87.553 U2.127@115.2,87.553
  Bottom Layer w0.2: v1(96.15,97.45) 99.55,97.45 99.906,97.094 ccw(c99.941,97.129) 99.977,97.094 cw(c100.118,96.953) 100.26,97.094 cw(c100.118,96.953) 100.26,96.811 100.224,96.776 100.189,96.74 ccw(c100.33,96.599) 100.189,96.458 ccw(c100.33,96.599) 100.472,96.458 100.542,96.528 cw(c100.684,96.387) 100.825,96.528 cw(c100.684,96.387) 100.825,96.245 100.79,96.21 100.755,96.175 ccw(c100.896,96.033) 100.755,95.892 ccw(c100.896,96.033) 101.037,95.892 101.073,95.927 101.108,95.963 cw(c101.25,95.821) 101.391,95.963 cw(c101.25,95.821) 101.391,95.68 101.356,95.644 101.32,95.609 ccw(c101.462,95.468) 101.32,95.326 ccw(c101.462,95.468) 101.603,95.326 101.638,95.362 101.674,95.397 cw(c101.815,95.255) 101.957,95.397 cw(c101.815,95.255) 101.957,95.114 101.921,95.079 101.886,95.043 ccw(c102.027,94.902) 101.886,94.76 ccw(c102.027,94.902) 102.169,94.76 102.24,94.831 cw(c102.381,94.69) 102.522,94.831 cw(c102.381,94.69) 102.522,94.548 102.487,94.513 102.452,94.478 ccw(c102.593,94.336) 102.452,94.195 ccw(c102.593,94.336) 102.734,94.195 102.77,94.23 102.805,94.265 cw(c102.947,94.124) 103.088,94.266 cw(c102.947,94.124) 103.088,93.983 103.053,93.947 103.017,93.912 ccw(c103.159,93.771) 103.017,93.629 ccw(c103.159,93.771) 103.3,93.629 103.336,93.664 103.371,93.7 cw(c103.512,93.558) 103.654,93.7 cw(c103.512,93.558) 103.654,93.417 103.618,93.382 103.583,93.346 ccw(c103.724,93.205) 103.583,93.063 ccw(c103.724,93.205) 103.866,93.063 103.937,93.134 cw(c104.078,92.993) 104.219,93.134 cw(c104.078,92.993) 104.219,92.851 104.184,92.816 104.149,92.781 ccw(c104.29,92.639) 104.149,92.498 ccw(c104.29,92.639) 104.432,92.498 104.467,92.533 104.502,92.568 cw(c104.644,92.427) 104.785,92.568 cw(c104.644,92.427) 104.785,92.286 104.75,92.25 104.714,92.215 ccw(c104.856,92.073) 104.714,91.932 ccw(c104.856,92.073) 104.997,91.932 105.033,91.967 105.068,92.003 cw(c105.209,91.861) 105.351,92.003 cw(c105.209,91.861) 105.351,91.72 105.28,91.649 ccw(c105.421,91.508) 105.28,91.366 ccw(c105.421,91.508) 105.563,91.366 105.598,91.402 105.634,91.437 cw(c105.775,91.296) 105.916,91.437 cw(c105.775,91.296) 105.916,91.154 105.881,91.119 105.846,91.084 ccw(c105.987,90.942) 105.846,90.801 ccw(c105.987,90.942) 106.129,90.801 106.164,90.836 106.199,90.871 cw(c106.341,90.73) 106.482,90.871 cw(c106.341,90.73) 106.482,90.589 106.447,90.553 106.411,90.518 ccw(c106.553,90.376) 106.411,90.235 ccw(c106.553,90.376) 106.694,90.235 106.73,90.27 106.765,90.306 cw(c106.906,90.164) 107.048,90.306 cw(c106.906,90.164) 107.048,90.023 106.977,89.952 ccw(c107.119,89.811) 106.977,89.669 ccw(c107.119,89.811) 107.26,89.669 107.295,89.705 107.331,89.74 cw(c107.472,89.599) 107.614,89.74 cw(c107.472,89.599) 107.614,89.457 107.578,89.422 107.543,89.387 ccw(c107.684,89.245) 107.543,89.104 ccw(c107.684,89.245) 107.826,89.104 107.861,89.139 107.896,89.174 cw(c108.038,89.033) 108.179,89.174 cw(c108.038,89.033) 108.179,88.892 108.144,88.856 108.108,88.821 ccw(c108.25,88.679) 108.108,88.538 ccw(c108.25,88.679) 108.391,88.538 108.427,88.573 108.462,88.609 cw(c108.603,88.467) 108.745,88.609 cw(c108.603,88.467) 108.745,88.326 108.674,88.255 ccw(c108.816,88.114) 108.674,87.972 ccw(c108.816,88.114) 108.957,87.972 108.992,88.008 109.028,88.043 cw(c109.169,87.902) 109.311,88.043 cw(c109.169,87.902) 109.311,87.76 ccw(c109.346,87.725) 109.311,87.689 111,86 ; 111,85.8 111,86 ; v1(112.075,86) 111,86
VGA1_RW_N: U2.120 U7.133 | length 53.8
  Top Layer w0.2: U7.133@91.7,66.05 91.75,66.1 92.605,66.1 93.675,67.17 93.675,68.076 94.249,68.65 94.85,68.65 95.4,68.1 104.2,68.1 105.072,68.972 cw(c105.232,68.813) 105.391,68.972 ; 105.376,68.987 ccw(c105.535,69.146) 105.694,68.987 ccw(c105.535,69.146) 105.694,69.305 105.55,69.45 105.405,69.594 cw(c105.565,69.753) 105.405,69.912 cw(c105.565,69.753) 105.724,69.912 105.868,69.768 106.012,69.624 ccw(c106.171,69.783) 106.33,69.624 ccw(c106.171,69.783) 106.33,69.942 106.186,70.086 106.042,70.23 cw(c106.201,70.39) 106.042,70.549 cw(c106.201,70.39) 106.36,70.549 106.504,70.404 106.649,70.26 ccw(c106.808,70.419) 106.967,70.26 ccw(c106.808,70.419) 106.967,70.578 106.823,70.723 106.678,70.867 cw(c106.837,71.026) 106.678,71.185 cw(c106.837,71.026) 106.996,71.185 107.141,71.041 107.285,70.896 ccw(c107.444,71.056) 107.603,70.896 ccw(c107.444,71.056) 107.603,71.215 107.459,71.359 107.315,71.503 cw(c107.474,71.662) 107.315,71.821 cw(c107.474,71.662) 107.633,71.821 107.777,71.677 107.921,71.533 ccw(c108.081,71.692) 108.24,71.533 ccw(c108.081,71.692) 108.24,71.851 108.095,71.995 107.951,72.14 cw(c108.11,72.299) 107.951,72.458 cw(c108.11,72.299) 108.269,72.458 108.413,72.314 108.558,72.169 ccw(c108.717,72.328) 108.876,72.169 ccw(c108.717,72.328) 108.876,72.487 108.732,72.632 108.587,72.776 cw(c108.747,72.935) 108.587,73.094 cw(c108.747,72.935) 108.906,73.094 109.05,72.95 109.194,72.806 ccw(c109.353,72.965) 109.512,72.806 ccw(c109.353,72.965) 109.512,73.124 109.368,73.268 109.224,73.412 cw(c109.383,73.571) 109.224,73.731 cw(c109.383,73.571) 109.542,73.731 109.686,73.586 109.831,73.442 ccw(c109.99,73.601) 110.149,73.442 ccw(c109.99,73.601) 110.149,73.76 110.005,73.905 109.845,74.064 cw(c110.005,74.223) 109.845,74.382 cw(c110.005,74.223) 110.164,74.382 ccw(c110.323,74.541) 110.482,74.382 ; 105.378,68.986 105.389,68.974 ; 110.641,74.541 110.482,74.382 ; U2.120@115.66,90.353 113.388,90.353 112.688,90.353 111.02,88.686 111.02,74.92 110.8,74.7 110.482,74.382
VGA1_TE: U2.50 U7.210 | length 75.4
  Top Layer w0.2: U7.210@75.05,91.7 75.05,94.716 80.384,100.05 96.676,100.05 97.471,100.845 101.27,100.845 105.425,105 119.625,105 v1(120,104.625) ; U2.50@130.56,93.953 v1@132.203,93.953
  Bottom Layer w0.2: v1(120,104.625) 121.461,103.164 121.461,102.719 122.005,102.175 130.884,102.175 132.75,100.309 132.75,94.5 v1@132.203,93.953
  other v1: 132.381,93.953
VGA1_VSYNC: R3.2 U2.43 | length 66.5
  Top Layer w0.2: v1(112.28,64.964) 112.28,64.395 114.1,62.575 v1@114.1,61.9 ; U2.43@130.56,91.153 131.839,91.153 v1@132.293,90.7
  Bottom Layer w0.2: v1(112.28,64.964) 112.28,75.576 118.829,82.125 128.825,82.125 130.11,83.41 130.524,83.41 132.905,85.791 132.905,90.207 v1@132.483,90.629 ; v1@114.25,61.75 125.25,50.75 R3.2@130,50.75
  other v1: 114.25,61.8 132.381,90.629
VGA2_B: R11.2 U7.80 | length 29.2
  Top Layer w0.203: v1@61.25,50.25 65.549,50.25 69.71,54.411 69.71,56.675 69.599,56.786 69.599,57.851 U7.80@69.55,57.9
  Bottom Layer w0.203: R11.2@50.05,39.15 60.894,49.993 v1@60.993,49.993
  other v1: 61.05,50.25
VGA2_G: R10.2 U7.78 | length 26.5
  Top Layer w0.203: v1(65.75,51.75) 68.397,54.397 68.397,56.675 68.55,56.828 U7.78@68.55,57.9
  Bottom Layer w0.203: R10.2@52.55,39.15 52.55,40.55 63.75,51.75 v1(65.75,51.75)
VGA2_HSYNC: R12.2 U7.73 | length 28.6
  Top Layer w0.203: v1(64.275,53.025) 65.706,54.457 65.706,55.957 66.05,56.3 U7.73@66.05,57.9
  Bottom Layer w0.203: R12.2@47.3,38.5 47.75,38.5 49.049,39.798 49.049,39.875 49.517,40.343 49.522,40.343 49.906,40.728 49.906,40.733 61.674,52.5 63.75,52.5 v1(64.275,53.025)
VGA2_R: R9.2 U7.76 | length 23.9
  Top Layer w0.203: v1(64,51) 67.55,54.55 U7.76@67.55,57.9
  Bottom Layer w0.203: R9.2@55.05,39.15 55.05,42.078 63.972,51 v1(64,51)
VGA2_VSYNC: R13.2 U7.63 | length 26
  Top Layer w0.203: v1(59.45,52.75) 59.45,52.7 60.75,54 60.75,56.522 61.002,56.774 U7.63@61.002,57.852
  Bottom Layer w0.203: R13.2@45.3,38.5 45.3,38.55 v1@59.475,52.725
  Bottom Layer w0.254: v1@59.45,52.7 v1(59.45,52.75)
pads on no net: J1.4 J1.9 J1.11 J1.12 J1.15 J3.4 J3.9 J3.11 J3.12 J3.15 J4.2 J4.6 J7.0 U2.24 U2.39 U2.49 U2.51 U2.52 U2.53 U3.2 U3.3 U3.6 U3.8 U3.9 U3.10 U3.11 U3.12 U3.13 U3.14 U3.19 U3.24 U3.27 U3.28 U4.5 U5.9 U5.12 U5.20 U6.9 U6.12 U6.20 U7.34 U7.65 U7.109 U8.6 U8.7 U8.8 U9.3 U9.4 U9.5 U9.6 U9.11 U9.12 U9.13 U9.14 U10.14 U10.16 U10.38 U10.39 U10.66 X1.1

## Keep-outs
Keep-Out Layer:
  the board outline again, w0.254

## Other copper
Top Layer:
  region net GND: 128.01,88.454 128.01,98.254 118.21,98.254 118.21,88.454
Bottom Layer:
  region net GND: 125.956,96.601 126.75,95.807 126.75,89.594 126.71,89.554 119.325,89.554 119.325,95.962 119.963,96.601

## Silkscreen, mask and mechanical layers (free items; w line width, h text height)
Top Overlay:
  drawing of 3705 lines, arcs and shapes, not listed
  text "IO5" at 90.5,116.3 h1 r90
  text "IO4" at 93,116.3 h1 r90
  text "IO3" at 95.7,116.3 h1 r90
  text "IO2" at 98.2,116.3 h1 r90
  text "IO1" at 100.7,116.3 h1 r90
  text "IO0" at 103.205,116.304 h1 r90
  text "3.3V" at 81.575,116.25 h1
  text "GND" at 82.175,108.65 h1
  text "8080" at 134,108.5 h1
  text "IO11" at 90.6,106.3 h1 r90
  text "IO10" at 93.1,106.3 h1 r90
  text "IO9" at 95.8,106.3 h1 r90
  text "IO8" at 98.3,106.3 h1 r90
  text "IO7" at 100.7,106.3 h1 r90
  text "IO6" at 103.3,106.3 h1 r90
  text "6800" at 134,103.25 h1
  text "Versatile FPGA-based" at 97.5,73.525 h1
  text "hardware data" at 100.375,71.35 h1
  text "processing board" at 99,69.15 h1
  text "2016" at 104.35,65.925 h1.25
  text "2.5V" at 72,33.25 h1 r90
  text "5V" at 74.75,33.25 h1 r90
  text "5V" at 77.25,33.25 h1 r90
  text "GND" at 73,25.75 h1
  text "5V" at 118.175,25.625 h1